# Altium PCB PCB1.PcbDoc
Units mil, origin at the board's own origin, x right, y up, seen from the top; angles counter-clockwise.
Board outline 6000 x 4000 mil, 2 copper layers (Top Layer, Bottom Layer); 10 components, 8 nets, 39 pads, 5 vias.
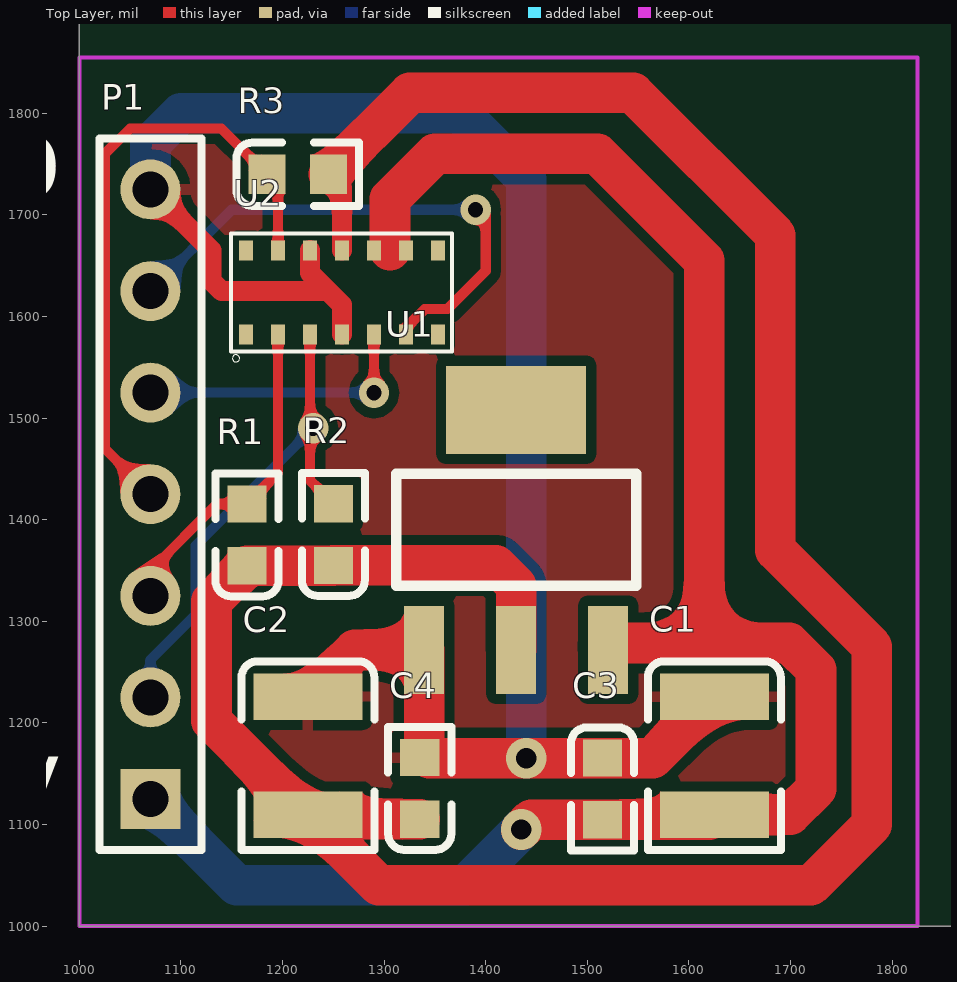
[diagram p0: Top Layer view]
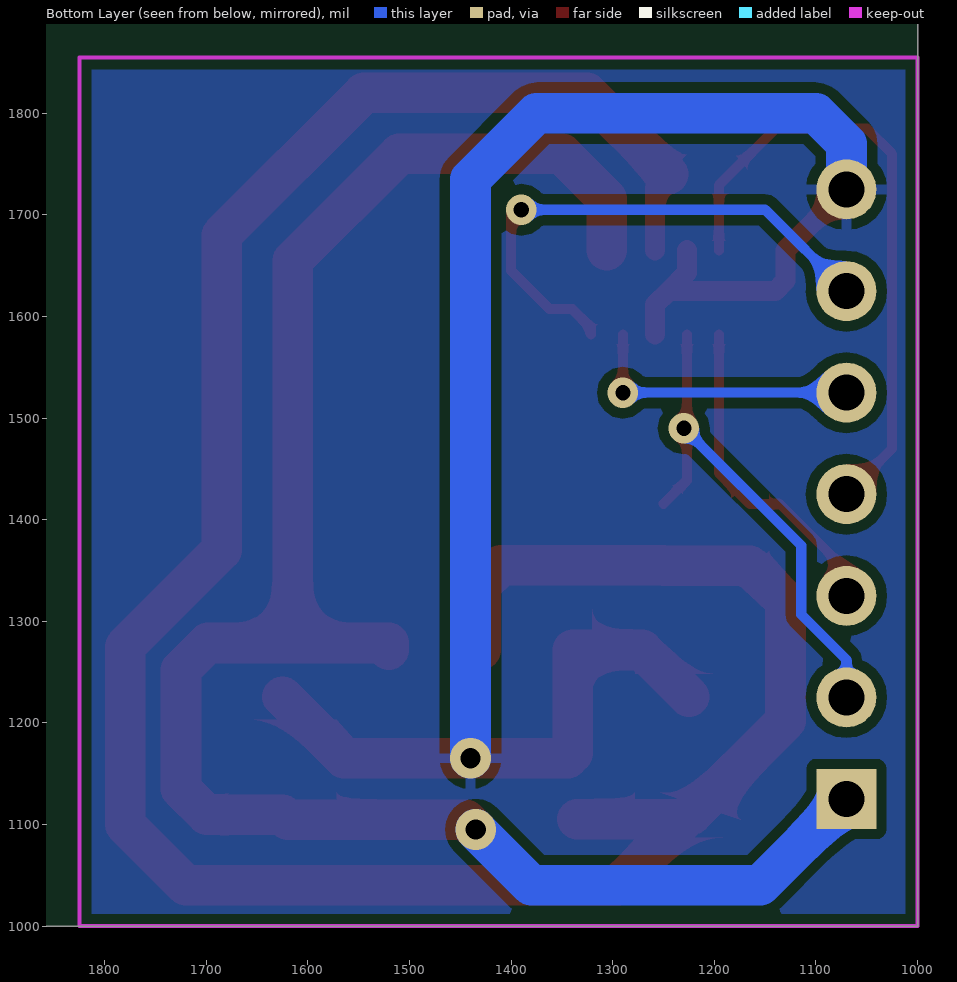
[diagram p1: Bottom Layer view, seen from below]
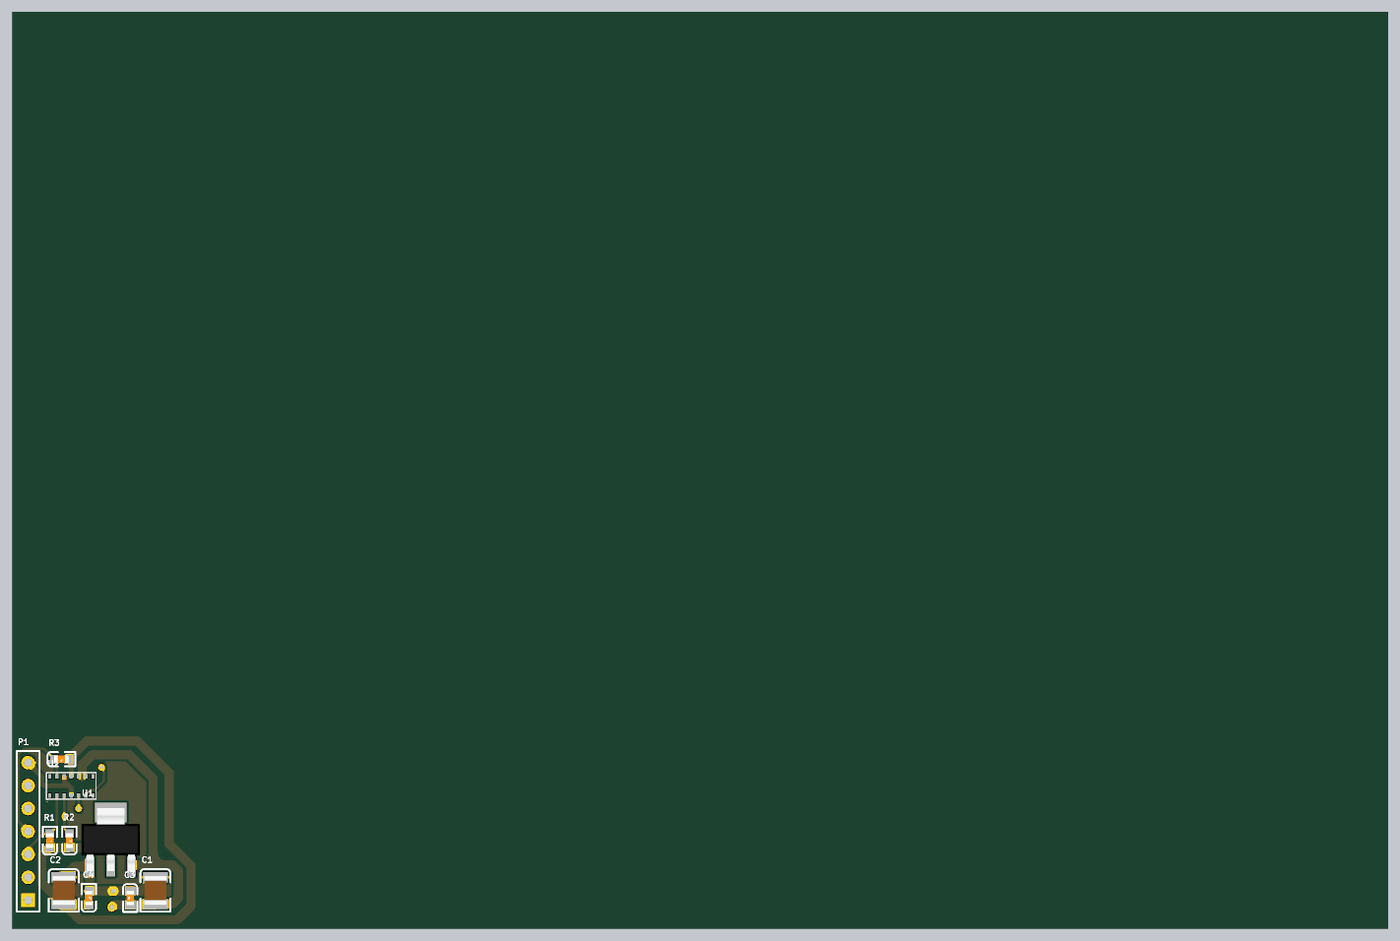
[diagram p2: 3D render of the assembled board from above, using the file's embedded part models]

## Layer stack, top to bottom
Top Solder: solder mask 0.4, Solder Resist, Dk 3.5
Top Layer: signal copper 1.4
Dielectric 1: dielectric 12.6, FR-4, Dk 4.8
Bottom Layer: signal copper 1.4
Bottom Solder: solder mask 0.4, Solder Resist, Dk 3.5

## Board outline
1000,1000 7000,1000 7000,5000 1000,5000

## Design rules (kind name [scope] priority, off if disabled: settings)
Clearance [All] p1: gap=10 ignorepadtopadclearanceinfootprint=FALSE except(0: Arc-Hole Track-Hole SMDPad-Hole THPad-Hole Via-Hole Fill-Hole Poly-Hole Region-Hole Text-Hole)
PolygonConnect [All] p1: connectstyle=Relief reliefconductorwidth=10 reliefentries=4 polygonreliefangle="90 Angle" airgapwidth=10
RoutingVias RoutingVias_1 [InNetClass('POWER')] p1: holewidth=20 width=40 viastyle="Through Hole" minholewidth=20 minwidth=40 maxholewidth=20 maxwidth=40
RoutingVias [All] p2: holewidth=15 width=30 viastyle="Through Hole" minholewidth=15 minwidth=30 maxholewidth=15 maxwidth=30
SolderMaskExpansion [All] p1: expansion=4
Width Width_1 [InNetClass('POWER')] p1: maxlimit=40 minlimit=10 preferedwidth=20
Width [All] p2: maxlimit=10 minlimit=10 preferedwidth=10
30 further rules are at their usual default settings.

## Classes and differential pairs
net class POWER: 1.8V 3.3V GND

## Components (designator, comment, footprint, x,y, rotation, side; value= is the part's Value field where it differs from the comment)
C1 "Cap Pol1" 1210 1625,1167.72 r90 top value=10uF
C2 "Cap Pol1" 1210 1225,1167.72 r90 top value=10uF
C3 "Cap" 0603 1515,1135 r90 top value=0.1uF
C4 "Cap" 0603 1335,1135.43 r270 top value=0.1uF
P1 "Header 7" HDR1X7 1070,1125 r90 top
R1 "Res2" 0603 1165,1385 r270 top value=472
R2 "Res2" 0603 1250,1385.32 r270 top value=472
R3 "Res2" 0603 1215,1740 r180 top value=472
U1 "AMS1117-1.8" SOT-223 1430,1390 r270 top
U2 "MAX30100" MAX30100 1164.02,1582.32 r90 top

## Footprints (in the part's own frame and the unit in brackets; to place one, negate y for a bottom-side part, rotate by r counter-clockwise, add the part's x,y. Pads: shape width x height; smd on the part's side, far side on the other; paste and mask are expansions set on the pad)
0603 [mm]
  rect 0.93x0.98 smd: 1(-0.77,0) 2(0.77,0)
  silkscreen extent -1.53,-0.79 1.54,0.79, body extent -0.8,-0.4 0.8,0.4, height 0.3
1210 [mm]
  rect 1.16x2.72 smd: 1(-1.475,0) 2(1.475,0)
  silkscreen extent -2.36,-1.66 2.35,1.66, body extent -1.6,-1.25 1.6,1.25, height 1.3
HDR1X7 [mm] "Connector; Header; 7 Position"
  rect 1.5x1.5 hole 0.9: 1(0,0)
  round 1.5 hole 0.9: 2(2.54,0) 3(5.08,0) 4(7.62,0) 5(10.16,0) 6(12.7,0) 7(15.24,0)
  silkscreen extent -1.27,-1.27 16.51,1.27
MAX30100 [mm]
  rect 0.5x0.35 smd: 1(0,0) 2(0,-0.8) 3(0,-1.6) 4(0,-2.4) 5(0,-3.2) 6(0,-4) 7(0,-4.8) 8(2.1,-4.8) 9(2.1,-4) 10(2.1,-3.2) 11(2.1,-2.4) 12(2.1,-1.6) 13(2.1,-0.8) 14(2.1,0)
  silkscreen extent -0.69,-5.15 2.52,0.38
SOT-223 [mm]
  rect 2.2x1 smd: 1(3,-2.3) 2(3,0) 3(3,2.3)
  rect 2.2x3.5 smd: ""(-3,0)
  silkscreen extent -1.4,-3 1.4,3, body extent -3.49,-3.24 3.49,3.24, height 1.64

## Part data
C1 C2: "Polarized Capacitor (Radial)", LatestRevisionDate=17-Jul-2002, LatestRevisionNote="Re-released for DXP Platform.", PackageDescription="Polarized Capacitor (Radial); 2 Leads", PackageReference=RB7.6-15, Published=8-Jun-2000, Publisher="Altium Limited"
C3 C4: "Capacitor", LatestRevisionDate=17-Jul-2002, LatestRevisionNote="Re-released for DXP Platform.", PackageDescription="Radial Cap, Thru-Hole; 2 Leads; 0.3 in Pin Spacing", PackageReference=RAD-0.3, Published=8-Jun-2000, Publisher="Altium Limited"
P1: "Header, 7-Pin", LatestRevisionDate=17-Jul-2002, LatestRevisionNote="Re-released for DXP Platform.", Publisher="Altium Limited"
R1 R2 R3: "Resistor", LatestRevisionDate=17-Jul-2002, LatestRevisionNote="Re-released for DXP Platform.", PackageDescription="Axial Device, Thru-Hole; 2 Leads; 0.4 in Pin Spacing", PackageReference=AXIAL-0.4, Published=8-Jun-2000, Publisher="Altium Limited"
U1: "3.3V~12V->1.8V"

## Via types
v1: diameter 30, hole 15, Top Layer to Bottom Layer, 3 vias
v2: diameter 40, hole 20, Top Layer to Bottom Layer, 2 vias

## Nets (pads, with @x,y where several pads share a name; then routed paths per layer and width w, separated by ;. In a path a pad name is that pad's centre, name@x,y a point inside that pad or via, vN(x,y) a via of type N, cw(c..) or ccw(c..) an arc to the next point about the centre after c; other vN are vias at no path point)
1.8V: C2.1 C4.2 R1.2 R2.2 R3.1 U1.2 U2.11 | length 2581.8
  Top Layer w20: R3.1 1258.5,1726.81 U2.11
  Top Layer w40: R3.1 1325.31,1820 1545,1820 1685,1680 1685,1370 1780,1275 1780,1100 1720,1040 1294.65,1040 C2.1@1229.53,1105.12 ; C4.2 C2.1@1229.53,1105.12 ; U1.2 1430,1335 1410,1355 R2.2 1249.68,1354.68 R1.2 1130,1319.68 1130,1201.98 1222.34,1109.65 C2.1 C2.1@1229.53,1105.12
3.3V: C1.1 C3.1 P1.1 U1.3 U2.9 U2.10 | length 1867.1
  Top Layer w40: 1305.75,1665 1305.75,1715.75 1350,1760 1510,1760 1615,1655 1615,1278.62 ; v2(1435,1095) 1444.69,1104.69 C3.1 1620.04,1104.69 C1.1 1699.65,1109.65 1725,1135 1725,1252.24 1698.62,1278.62 1615,1278.62 ; U1.3 1520.55,1278.62 1615,1278.62
  Bottom Layer w40: P1.1 1155,1040 1380,1040 v2(1435,1095)
GND: C1.2 C2.2 C3.2 C4.1 P1.7 U1.1 U2.4 U2.12 | length 1902.4
  Top Layer w20: P1.7 1130,1665 1130,1635 1140,1625 1245,1625 ; U2.12 1227.01,1642.99 1245,1625 ; U2.4 1258.5,1611.5 1245,1625
  Top Layer w40: C2.2 1271.1,1271.89 U1.1 1339.45,1170.2 1344.33,1165.32 v2@1439.68,1165.32 ; v2(1440,1165) v2@1439.68,1165.32 ; C1.2 1564.53,1165.32 C3.2 v2@1439.68,1165.32
  Bottom Layer w40: P1.7 1070,1770 1100,1800 1375,1800 1440,1735 v2(1440,1165)
INT: P1.4 R3.2 U2.13 | length 621.8
  Top Layer w10: P1.4 1025,1470 1025,1760 1050,1785 1139.68,1785 R3.2 1195.51,1729.17 U2.13
IRD: P1.5 U2.5 | length 277.3
  Top Layer w10: v1(1290,1525) U2.5
  Bottom Layer w10: P1.5 v1(1290,1525)
RD: P1.6 U2.6 | length 525.5
  Top Layer w10: U2.6 1321.5,1588.77 1339.89,1607.17 1362.17,1607.17 1400,1645 1400,1695 v1(1390,1705)
  Bottom Layer w10: P1.6 1150,1705 v1(1390,1705)
SCL: P1.3 R1.1 U2.2 | length 326.7
  Top Layer w10: P1.3 1070,1350 1135.31,1415.31 R1.1 1195.51,1445.83 U2.2
SDA: P1.2 R2.1 U2.3 | length 507.5
  Top Layer w10: U2.3 1227.01,1438.62 R2.1
  Bottom Layer w10: P1.2 1070,1262.03 1114.53,1306.56 1114.53,1374.53 v1(1230,1490)
pads on no net: U1. U2.1 U2.7 U2.8 U2.14

## Polygon pours and split planes (outlines as drawn)
GND on Bottom Layer "Keep-Out Layer-No Net" (solid, remove dead copper, pour order 4): 1000,1855 1825,1855 1825,1000 1000,1000
GND on Top Layer "Keep-Out Layer-No Net" (solid, remove dead copper, pour order 6): 1000,1000 1825,1000 1825,1855 1000,1855

## Keep-outs
Keep-Out Layer:
  lines w3.94: 1000,1000 1825,1000 1825,1855 1000,1855 1000,1000

## Silkscreen, mask and mechanical layers (free items; w line width, h text height)
Top Overlay:
  text "GND" at 765,1690 h118.11
  text "RD" at 765,1586.23 h118.11
  text "IRD" at 765,1483.73 h118.11
  text "INT" at 765,1381.23 h118.11
  text "SCL" at 765,1280 h118.11
  text "SDA" at 765,1177.5 h118.11
  text "3.3V" at 765,1075 h118.11